# Altium PCB PCB_UVC_Controller_2021-11-05.pcbdoc
Units mil, origin at the board's own origin, x right, y up, seen from the top; angles counter-clockwise.
Board outline 6714.65 x 3384.85 mil, 2 copper layers (Top Layer, Bottom Layer); 67 components, 50 nets, 214 pads, 225 vias.
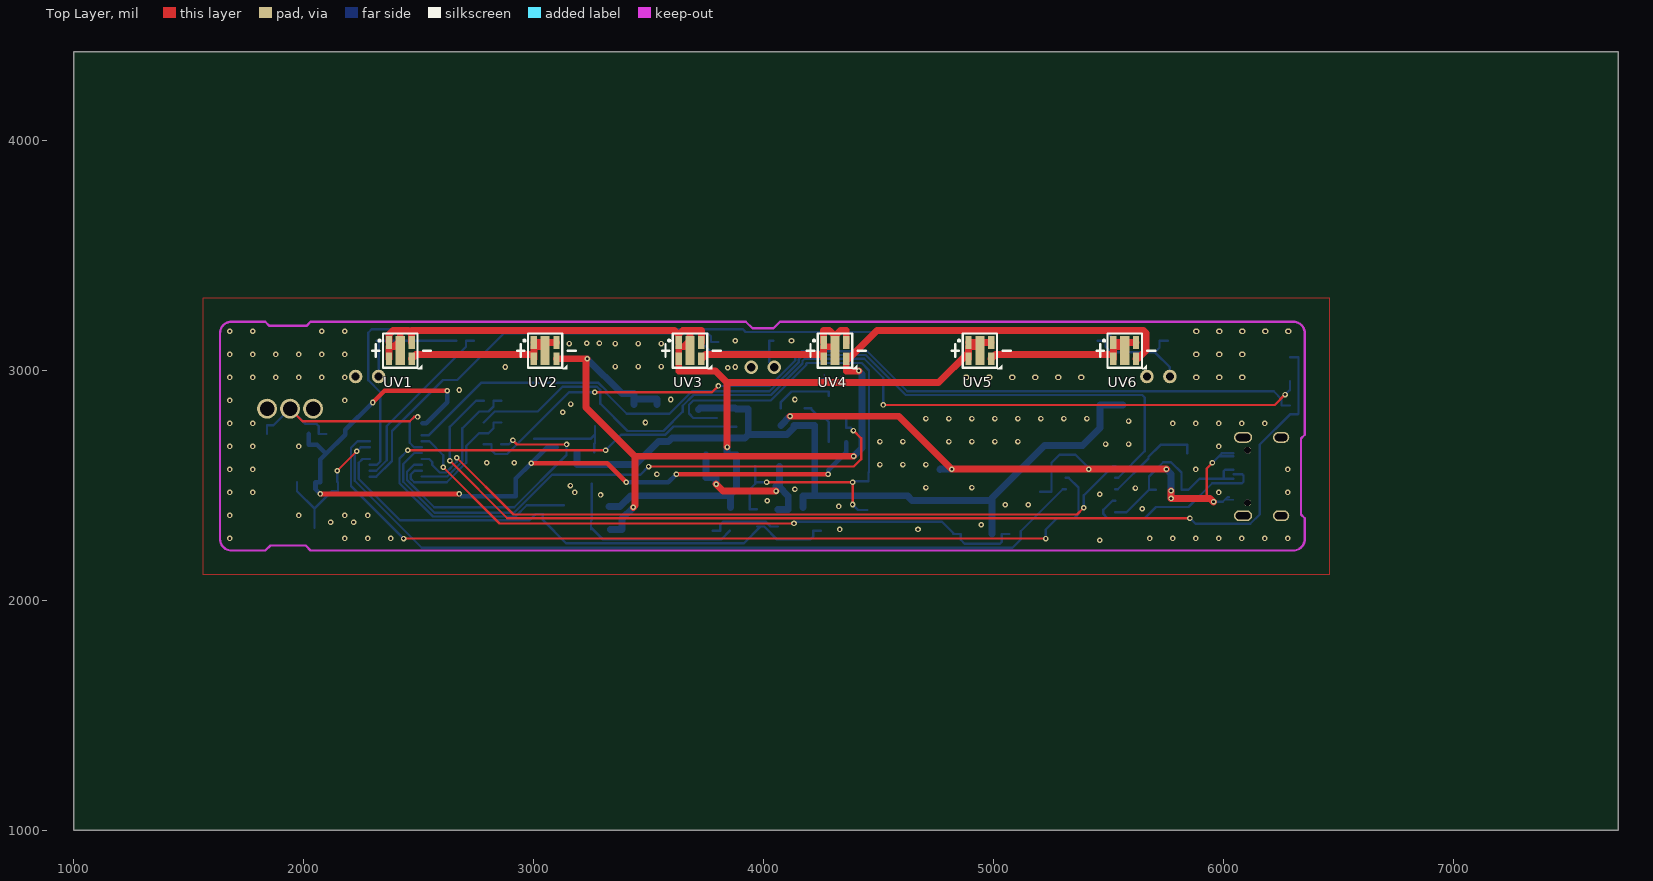
[diagram p0: Top Layer view]
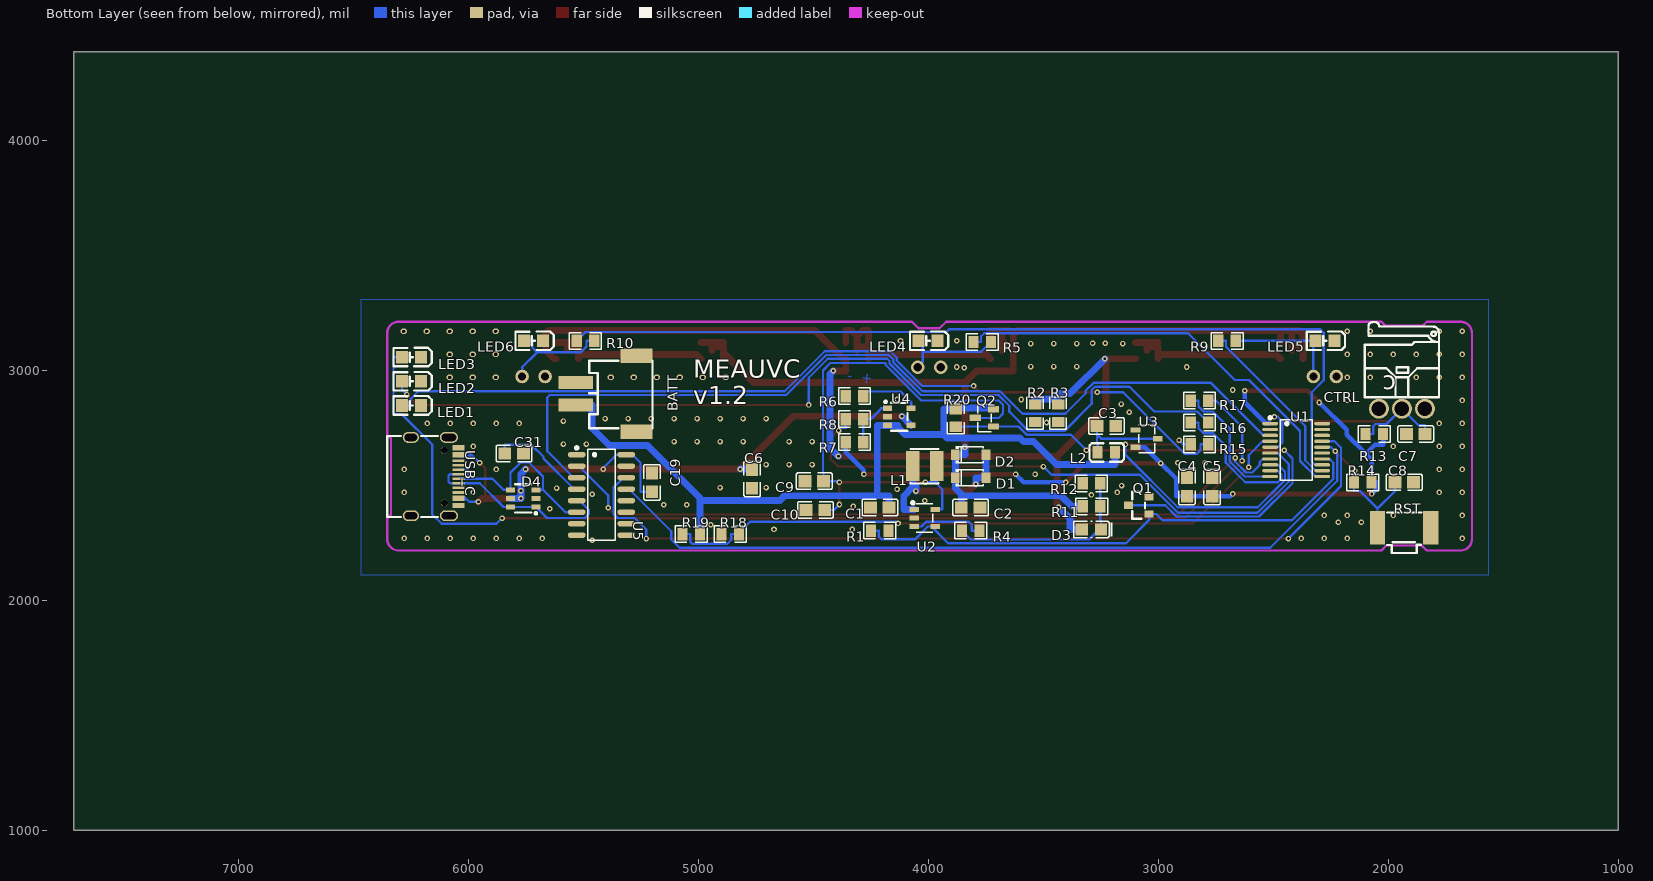
[diagram p1: Bottom Layer view, seen from below]

## Layer stack, top to bottom
Top Layer: signal copper (thickness not stored)
Dielectric: dielectric 12.6, FR-4, Dk 4.8
Bottom Layer: signal copper (thickness not stored)

## Board outline
7714.65,1000 1000,1000 1000,4384.85 7714.65,4384.85

## Components (designator, comment, footprint, x,y, rotation, side; value= is the part's Value field where it differs from the comment)
BATT "XH-2PWB" CONN-SMD_2P-P2.50_XH-2PWB 5400.4,2898.05 r90 bottom
C1 "22uF" C0805 4210.4,2403.05 r0 bottom
C2 "22uF" C0805 3815.4,2403.05 r180 bottom
C3 "22uF" C0805 3225.4,2758.05 r180 bottom
C4 "22uF" C0805 2875.4,2493.05 r90 bottom
C5 "1nF" C0805 2765.4,2493.05 r90 bottom
C6 "22uF" C0805 4765.4,2528.05 r270 bottom
C7 "1nF" C0805 1880.4,2723.05 r0 bottom
C8 "1nF" C0805 1930.4,2513.05 r180 bottom
C9 "22uF" C0805 4495.4,2518.05 r0 bottom
C10 "22uF" C0805 4490.4,2393.05 r0 bottom
C19 "100nF" C0805 5200.4,2513.05 r270 bottom
C31 "100nF" C0805 5800.4,2638.05 r0 bottom
CTRL "MDS6500AL02LS" SW-TH_MDS6500AL02LS 1940.4,2833.05 r0 bottom
D1 "B5819W" SOD-123_L2.8-W1.8-LS3.7-RD 3815.4,2533.05 r0 bottom
D2 "B5819W" SOD-123_L2.8-W1.8-LS3.7-RD 3815.4,2633.05 r0 bottom
D3 "SD0805S020S1R0" D0805-RD 3290.4,2308.05 r180 bottom
D4 "USBLC6-4SC6" SOT-23-6_L2.9-W1.6-P0.95-LS2.8-BR 5760.4,2443.05 r0 bottom
L1 "10uH" IND-SMD_L3.0-W3.0 4015.4,2583.05 r0 bottom
L2 "2.2uH" L0805 3225.4,2643.05 r180 bottom
LED1 "White" LED0805-FD 6246.3,2846.95 r0 bottom
LED2 "White" LED0805-FD 6246.3,2951.95 r0 bottom
LED3 "White" LED0805-FD 6246.3,3056.95 r0 bottom
LED4 "White" LED0805-FD 4000.4,3128.05 r0 bottom
LED5 "White" LED0805-FD 2275.16,3128.05 r0 bottom
LED6 "White" LED0805-FD 5715.64,3128.05 r0 bottom
Q1 "2N7002,215" SOT-23_L2.9-W1.3-P1.90-LS2.4-BR 3084.74,2413.04 r0 bottom
Q2 "AO3415_C181094" SOT-23-3_L2.9-W1.3-P1.90-LS2.4-BR 3755.4,2793.05 r0 bottom
R1 "100K" R0805 4210.4,2303.05 r180 bottom
R2 "33" R0805 3535.4,2813.05 r270 bottom
R3 "33" R0805 3435.4,2813.05 r270 bottom
R4 "10K" R0805 3815.4,2303.05 r0 bottom
R5 "330" R0805 3765.4,3123.05 r0 bottom
R6 "2.2K" R0805 4320.4,2888.05 r0 bottom
R7 "680K" R0805 4320.4,2688.05 r180 bottom
R8 "100K" R0805 4320.4,2788.05 r180 bottom
R9 "330" R0805 2700.4,3128.05 r0 bottom
R10 "330" R0805 5490.4,3128.05 r0 bottom
R11 "120K" R0805 3289.74,2408.04 r180 bottom
R12 "10K" R0805 3290.4,2508.05 r0 bottom
R13 "51K" R0805 2060.4,2723.05 r0 bottom
R14 "51K" R0805 2110.4,2513.05 r0 bottom
R15 "330" R0805 2820.4,2678.05 r0 bottom
R16 "330" R0805 2820.4,2773.05 r0 bottom
R17 "330" R0805 2820.4,2868.05 r0 bottom
R18 "1M" R0805 5030.4,2288.05 r0 bottom
R19 "1M" R0805 4860.4,2288.05 r0 bottom
R20 "10K" R0805 3880.4,2793.05 r270 bottom
RST "KSS241GLFS" KEY-SMD_KSS-2G 1930.44,2314.91 r180 bottom
U1 "MSP430G2553IPW20" TSSOP-20_L6.5-W4.4-P0.65-LS6.4-BL 2400.4,2653.05 r90 bottom
U2 "WD3133E-5/TR" TSOT-23-5_L2.9-W1.6-P0.95-LS2.8-BL 4015.4,2358.05 r90 bottom
U3 "XC6206P332MR" SOT-23-3_L2.9-W1.6-P1.90-LS2.8-BR 3050.41,2703.05 r180 bottom
U4 "TP4054" SOT-23-5_L3.0-W1.7-P0.95-LS2.8-BR 4125.4,2798.05 r180 bottom
U5 "CH340B" SOIC-16_L9.9-W3.9-P1.27-LS6.0-BL 5420.4,2458.05 r90 bottom
USB_C "TYPE-C-31-M-12" USB-C_SMD-TYPE-C-31-M-12 6145.39,2538.08 r90 bottom
UV1 "F.35.00041" LED-SMD_5P-L3.5-W3.5_UVC-UVA 2419.5,3085.45 r0 top
UV2 "F.35.00041" LED-SMD_5P-L3.5-W3.5_UVC-UVA 3049.4,3085.45 r0 top
UV3 "F.35.00041" LED-SMD_5P-L3.5-W3.5_UVC-UVA 3679.3,3085.45 r0 top
UV4 "F.35.00041" LED-SMD_5P-L3.5-W3.5_UVC-UVA 4309.2,3085.45 r0 top
UV5 "F.35.00041" LED-SMD_5P-L3.5-W3.5_UVC-UVA 4939.1,3085.45 r0 top
UV6 "F.35.00041" LED-SMD_5P-L3.5-W3.5_UVC-UVA 5569.1,3085.45 r0 top
? "" ? 3992.9,1885.02 r0 top
? "" ? 6627.39,2378.05 r0 top
? "" ? 6756.52,2716.25 r0 top
? "" ? 6035.5,3354.75 r0 top
? "" ? 1847.9,3334.45 r0 top
? "" ? 1955.3,3497.95 r0 top

## Footprints (in the part's own frame and the unit in brackets; to place one, negate y for a bottom-side part, rotate by r counter-clockwise, add the part's x,y. Pads: shape width x height; smd on the part's side, far side on the other; paste and mask are expansions set on the pad)
C0805 [mm]
  rect 1.41x1.35 smd: 1(1.03,0) 2(-1.03,0)
  silkscreen extent -1.96,-0.9 1.96,0.9
CONN-SMD_2P-P2.50_XH-2PWB [mm]
  rect 1.4x3.8 smd: 1(1.25,3.35) 2(-1.25,3.35)
  rect 1.6x3.5 smd: 3(4.2,-3.35) 4(-4.2,-3.35)
  silkscreen extent -3.82,-5.14 3.65,1.87
D0805-RD [mm]
  rect 1.335x1.35 smd: 1(1.068,0) 2(-1.067,0)
  silkscreen extent -1.96,-0.94 2.29,0.94
IND-SMD_L3.0-W3.0 [mm]
  rect 1.5x3.32 smd: 1(-1.328,0) 2(1.328,0)
  silkscreen extent -1.52,-1.91 1.52,1.91
KEY-SMD_KSS-2G [mm]
  rect 1.7x3.7 smd: 1(2.95,0) 2(-2.95,0)
  silkscreen extent -1.87,-2.78 1.87,1.7
L0805 [mil]
  rect 44.59x54.21 smd: 1(38.05,0) 2(-38.04,0)
  silkscreen extent -73,-40 77,40
LED0805-FD [mil]
  rect 51.2x55.1 smd: 1(41.35,0) 2(-41.35,0)
  silkscreen extent -88,-41 78,40
LED-SMD_5P-L3.5-W3.5_UVC-UVA [mm]
  rect 0.7x1.4 smd: 1(-1.25,0.9) 2(1.25,0.9) 3(-1.25,-0.9) 4(1.25,-0.9)
  rect 1x3.2 smd: 5(0,0)
  silkscreen extent -3.1,-2.05 3.4,1.9
R0805 [mil]
  rect 44.59x54.21 smd: 1(38.04,0) 2(-38.04,0)
  silkscreen extent -69,-36 69,36
SOD-123_L2.8-W1.8-LS3.7-RD [mm]
  rect 0.95x1.15 smd: 1(1.693,0) 2(-1.693,0)
  silkscreen extent -1.41,-0.94 1.63,0.94
SOIC-16_L9.9-W3.9-P1.27-LS6.0-BL [mil]
  oval 23.7x77.6 smd: 1(175,107.7) 2(125,107.7) 3(75,107.7) 4(25,107.7) 5(-25,107.7) 6(-75,107.7) 7(-125,107.7) 8(-175,107.7) 9(-175,-107.7) 10(-125,-107.7) 11(-75,-107.7) 12(-25,-107.7) 13(25,-107.7) 14(75,-107.7) 15(125,-107.7) 16(175,-107.7)
  silkscreen extent -198,-60 211,114
SOT-23-3_L2.9-W1.3-P1.90-LS2.4-BR [mm]
  rect 1.25x0.7 smd: 1(-1,0.95) 2(-1,-0.95) 3(1,0)
  silkscreen extent -0.73,-1.53 0.73,1.53
SOT-23-3_L2.9-W1.6-P1.90-LS2.8-BR [mm]
  rect 1.07x0.6 smd: 1(-1.235,0.95) 2(-1.235,-0.95) 3(1.235,0)
  silkscreen extent -0.88,-1.54 0.88,1.54
SOT-23-5_L3.0-W1.7-P0.95-LS2.8-BR [mm]
  rect 1x0.6 smd: 1(-1.3,0.95) 2(-1.3,0) 3(-1.3,-0.95) 4(1.3,-0.95) 5(1.3,0.95)
  silkscreen extent -1.65,-1.55 0.9,1.78
SOT-23-6_L2.9-W1.6-P0.95-LS2.8-BR [mm]
  rect 1x0.55 smd: 1(-1.4,0.95) 2(-1.4,0) 3(-1.4,-0.95) 4(1.4,-0.95) 5(1.4,0) 6(1.4,0.95)
  silkscreen extent -1.52,-1.55 0.9,1.78
SOT-23_L2.9-W1.3-P1.90-LS2.4-BR [mm]
  rect 1x0.8 smd: 1(-1.15,0.95) 2(-1.15,-0.95) 3(1.15,0)
  silkscreen extent -0.7,-1.5 0.7,1.5
SW-TH_MDS6500AL02LS [mm]
  round 2.2 hole 1.6: 1(-2.54,0) 2(2.54,0) 3(0,0)
  silkscreen extent -4.1,-9.57 4.1,-1.27
TSOT-23-5_L2.9-W1.6-P0.95-LS2.8-BL [mm]
  rect 0.532x1.045 smd: 1(0.95,1.147) 2(0,1.147) 3(-0.95,1.147) 4(-0.95,-1.147) 5(0.95,-1.147)
  silkscreen extent -1.55,-0.9 1.82,1.45
TSSOP-20_L6.5-W4.4-P0.65-LS6.4-BL [mm]
  oval 0.364x1.742 smd: 1(2.925,2.871) 2(2.275,2.871) 3(1.625,2.871) 4(0.975,2.871) 5(0.325,2.871) 6(-0.325,2.871) 7(-0.975,2.871) 8(-1.625,2.871) 9(-2.275,2.871) 10(-2.925,2.871) 11(-2.925,-2.871) 12(-2.275,-2.871) 13(-1.625,-2.871) 14(-0.975,-2.871) 15(-0.325,-2.871) 16(0.325,-2.871) 17(0.975,-2.871) 18(1.625,-2.871) 19(2.275,-2.871) 20(2.925,-2.871)
  silkscreen extent -3.33,-1.77 3.71,3.02
USB-C_SMD-TYPE-C-31-M-12 [mm]
  oval 1.2x2 hole 0.8 slot 1.6 at 90 deg: 0(-4.325,-1.566) 0(4.325,-1.566)
  oval 1.2x1.8 hole 0.8 slot 1.4 at 90 deg: 0(-4.325,2.634) 0(4.325,2.634)
  rect 0.3x1.3 smd: A1(3.35,-2.634) A4(2.55,-2.634) A5(1.25,-2.634) A6(0.25,-2.634) A7(-0.25,-2.634) A8(-1.25,-2.634) A9(-2.55,-2.634) A12(-3.35,-2.634) B1(-3.05,-2.634) B4(-2.25,-2.634) B5(-1.75,-2.634) B6(-0.75,-2.634) B7(0.75,-2.634) B8(1.75,-2.634) B9(2.25,-2.634) B12(3.05,-2.634)
  round 0.75 hole 0.75 unplated: ""(-2.9,-1.066) ""(2.9,-1.066)
  silkscreen extent -4.47,-0.35 4.47,5.23
? [mil]

## Free pads (board coordinates)
  round 59.05 hole 35.43: 1(2325.4,2973.05) 1(4045.4,3013.05) 1(5765.4,2973.05) 2(2225.4,2973.05) 2(3945.4,3013.05) 2(5665.4,2973.05)

## Via types
v1: diameter 24.02, hole 12.01, Top Layer to Bottom Layer, 199 vias
v2: diameter 24.02, hole 11.81, Top Layer to Bottom Layer, 18 vias
v3: diameter 24, hole 12, Top Layer to Bottom Layer, 8 vias

## Nets (pads, with @x,y where several pads share a name; then routed paths per layer and width w, separated by ;. In a path a pad name is that pad's centre, name@x,y a point inside that pad or via, vN(x,y) a via of type N, cw(c..) or ccw(c..) an arc to the next point about the centre after c; other vN are vias at no path point)
3V3: C4.2 C5.2 R7.2 R13.2 R14.2 U1.1 U3.2 | length 3878.8
  Top Layer w20: v2@2071.46,2462.35 v2@2676.24,2462.35 ; v2(2299.43,2859.99) 2351.04,2911.6 v2(2623.9,2911.6) ; v2(2988.48,2596.17) 3319.03,2596.17 v2(3402.28,2512.92) ; v2(3620.29,2547.93) v2(4279.37,2547.93)
  Bottom Layer w20: R13.2@2022.36,2723.05 2022.36,2675.93 2057.6,2675.93 2096.76,2636.77 ; v2@2071.46,2462.35 2050.91,2482.9 2050.91,2513.05 2071.76,2513.05 2072.36,2513.05 2072.36,2612.37 2096.76,2636.77 ; v2(2299.43,2859.99) 2180.17,2740.73 2180.17,2720.18 2096.76,2636.77 ; U1.1@2516.3,2769.85 2532.2,2769.85 2623.9,2861.55 v2(2623.9,2911.6) ; v2@2676.24,2462.35 2686.09,2452.5 2718.82,2452.5 C5.2 C4.2 2921.99,2452.5 2921.99,2529.68 v2(2988.48,2596.17) 3057.96,2665.65 U3.2@3099.03,2665.65 ; v2(3402.28,2512.92) 3585.28,2512.92 v2(3620.29,2547.93) ; v2(4279.37,2547.93) 4279.37,2564.61 4358.44,2643.68 R7.2@4358.44,2688.05
  other v2: 2071.46,2462.35 2676.24,2462.35
BAT: BATT.2 C1.2 L2.1 Q2.2 R18.2 R20.2 U4.3 | length 3633.6
  Bottom Layer w30: L2.1@3187.36,2643.05 3187.36,2590.94 3442.2,2590.94 3541.64,2690.38 3584.66,2690.38 3600.74,2706.46 3918.05,2706.46 3932.52,2720.93 ; Q2.2@3716.03,2830.45 3721.66,2836.08 3875.41,2836.08 R20.2 3932.52,2831.09 3932.52,2720.93 ; C1.2@4169.85,2403.05 4169.85,2454.64 4221.28,2454.64 ; R18.2@4992.36,2288.05 4992.36,2434.72 ; BATT.2@5562.28,2848.84 5462.47,2848.84 5462.47,2749.03 5386.49,2673.05 5221.03,2673.05 4992.36,2444.38 4992.36,2434.72 ; 3932.52,2720.93 3932.81,2720.64 4101.1,2720.64 4131.89,2751.43 4131.89,2760.65 4176.59,2760.65 4221.28,2760.65 4221.28,2454.64 ; 4221.28,2454.64 4625.08,2454.64 4645,2434.72 4992.36,2434.72
BAT_SENSE: R18.1 R19.2 U1.4 | length 2833.6
  Top Layer w10: v1(2606.59,2578.88) 2851.44,2334.03 v1(4131.23,2334.03)
  Bottom Layer w10: U1.4 2546.04,2691.44 2606.59,2630.89 v1(2606.59,2578.88) ; v1(4131.23,2334.03) 4138.65,2341.45 4774.74,2341.45 R19.2@4828.14,2288.05 ; R19.2@4822.36,2288.05 R19.2@4828.14,2288.05 ; R18.1@5068.44,2288.05 5035.08,2288.05 5035.08,2254.69 5026.29,2245.9 4872.85,2245.9 4855.72,2263.03 4855.72,2288.05 4839.04,2288.05 4833.91,2288.05 R19.2@4828.14,2288.05
CHARGE_: R8.2 U1.6 | length 2533.3
  Top Layer w10: v1(3498.93,2581.51) 4390.79,2581.51 4422.98,2613.7 4422.98,2704.57 v1@4389.5,2738.05
  Bottom Layer w10: U1.6 2480.25,2640.25 2432.32,2592.32 2432.32,2515.95 2568.02,2380.25 2913.38,2380.25 3079.36,2546.23 3463.65,2546.23 v1(3498.93,2581.51) ; R8.2@4358.44,2788.05 4358.44,2749.87 4377.68,2749.87 v1@4389.5,2738.05
  other v1: 4389.5,2738.05
CTRL: C7.2 CTRL.3 R13.1 U1.5 | length 1172.7
  Top Layer w10: CTRL.3 1994.8,2778.65 2461,2778.65 2479.8,2797.45 v1@2494.9,2797.45
  Bottom Layer w10: C7.2@1839.85,2723.05 1839.85,2760.7 1868.05,2760.7 1940.4,2833.05 2007.22,2766.23 2055.26,2766.23 2065.08,2756.41 2065.08,2723.05 2081.76,2723.05 R13.1@2098.44,2723.05 ; v1@2494.9,2797.45 2479.8,2797.45 2460.4,2778.05 2460.4,2684.85 2479.4,2665.85 U1.5
  other v1: 2494.86,2797.49
D3_1: D3.1 R4.1 R11.1 R12.2 | length 844.5
  Bottom Layer w10: D3.1 D3.1@3248.37,2316.43 ; R12.2 3252.36,2446.88 3251.7,2446.22 3251.7,2427.13 R11.1 3251.7,2349.01 3248.37,2345.68 D3.1@3248.37,2316.43 ; R4.1@3853.44,2303.05 3814.49,2264.1 3300.7,2264.1 D3.1@3248.37,2316.43
DTR: C8.2 R14.1 RST.2 U1.16 U5.13 | length 4106.7
  Top Layer w10: v3(2145.4,2563.05) v3(2230.4,2648.05)
  Bottom Layer w10: C8.2@1970.95,2513.05 1970.95,2474.44 2046.58,2398.81 ; RST.2 2046.58,2398.81 ; v3(2145.4,2563.05) 2145.4,2516.09 R14.1 2148.44,2474.87 2122.64,2474.87 2046.58,2398.81 ; U1.16 2248.2,2665.84 v3(2230.4,2648.05) 2221.31,2638.95 2221.31,2520.04 2512.8,2228.55 5080.79,2228.55 5117.16,2264.92 5117.16,2300.06 5300.15,2483.05 U5.13@5312.69,2483.05
GND: BATT.1 BATT.3 BATT.4 C1.1 C2.1 C3.1 C4.1 C5.1 C6.1 C7.1 C8.1 C9.1 C10.1 C19.2 C31.2 CTRL.1 D4.2 LED1.2 LED2.2 LED3.2 LED4.2 LED5.2 LED6.2 pad.2 Q1.2 R1.1 R2.1 R3.1 R6.1 R12.1 R19.1 RST.1 U1.20 U2.2 U3.1 U4.2 U5.1 USB_C.0 USB_C.A1 USB_C.A12 USB_C.B1 USB_C.B12
  other v1: 5460.56,2261.44 1678.2,2269.27 1678.2,2269.27 2178.2,2269.27 2278.2,2269.27 2378.2,2269.27 5678.2,2269.27 5778.2,2269.27 5878.2,2269.27 5978.2,2269.27 6078.2,2269.27 6178.2,2269.27 6278.2,2269.27 4330.4,2308.05 4670.4,2308.05 4945.4,2328.05 2116.46,2338.89 2216.45,2338.89 1678.2,2369.27 1678.2,2369.27 1978.2,2369.27 1978.2,2369.27 2178.2,2369.27 2278.2,2369.27 5645.4,2398.05 4325.4,2408.05 5049.57,2415.85 5149.57,2415.85 4015.4,2433.05 3290.4,2458.05 5460.56,2461.44 1678.2,2469.27 1678.2,2469.27 1778.2,2469.27 1778.2,2469.27 3178.2,2469.27 5978.2,2469.27 6278.2,2469.27 4135.4,2483.05 5615.4,2488.05 4704.79,2490.32 4904.79,2490.32 3159.13,2499.03 1678.2,2569.27 1678.2,2569.27 1778.2,2569.27 1778.2,2569.27 5878.2,2569.27 6278.2,2569.27 4504.79,2590.32 4604.79,2590.32 4704.79,2590.32 2795.4,2598.05 2915.4,2598.05 1678.2,2669.27 1678.2,2669.27 1778.2,2669.27 1778.2,2669.27 1978.2,2669.27 1978.2,2669.27 5978.2,2669.27 5485.81,2679.08 5585.81,2679.08 4504.79,2690.32 4604.79,2690.32 4804.79,2690.32 4904.79,2690.32 5004.79,2690.32 5104.79,2690.32 1678.2,2769.27 1678.2,2769.27 1778.2,2769.27 1778.2,2769.27 5778.2,2769.27 5878.2,2769.27 5978.2,2769.27 6078.2,2769.27 6178.2,2769.27 3485.4,2773.05 5585.81,2779.08 4704.79,2790.32 4804.79,2790.32 4904.79,2790.32 5004.79,2790.32 5104.79,2790.32 5204.79,2790.32 5304.79,2790.32 5404.79,2790.32 3125.4,2818.05 3160.4,2853.05 1678.2,2869.27 1678.2,2869.27 2178.2,2869.27 2178.2,2869.27 3595.4,2873.05 4135.4,2873.05 2676.1,2914.32 1678.2,2969.27 1678.2,2969.27 1778.2,2969.27 1778.2,2969.27 1878.2,2969.27 1878.2,2969.27 1978.2,2969.27 1978.2,2969.27 2078.2,2969.27 2078.2,2969.27 2178.2,2969.27 2178.2,2969.27 4878.2,2969.27 4882,2969.26 4978.2,2969.27 4982,2969.26 5078.2,2969.27 5082,2969.26 5178.2,2969.27 5182,2969.26 5278.2,2969.27 5282,2969.26 5378.2,2969.27 5382,2969.26 5878.2,2969.27 5882,2969.26 5978.2,2969.27 5982,2969.26 6078.2,2969.27 6082,2969.26 3842.77,3011.1 2876.1,3014.32 3876.1,3014.32 3354.6,3016.25 3454.6,3016.25 3554.6,3016.25 1678.2,3069.27 1678.2,3069.27 1778.2,3069.27 1778.2,3069.27 1878.2,3069.27 1878.2,3069.27 1978.2,3069.27 1978.2,3069.27 2078.2,3069.27 2078.2,3069.27 2178.2,3069.27 2178.2,3069.27 5878.2,3069.27 5882,3069.26 5978.2,3069.27 5982,3069.26 6078.2,3069.27 6082,3069.26 3154.6,3116.25 3354.6,3116.25 3454.6,3116.25 3554.6,3116.25 3230.4,3118.05 3285.4,3118.05 3875.4,3128.05 4120.4,3128.05 1678.2,3169.27 1678.2,3169.27 1778.2,3169.27 1778.2,3169.27 2078.2,3169.27 2078.2,3169.27 2178.2,3169.27 2178.2,3169.27 5878.2,3169.27 5882,3169.26 5978.2,3169.27 5982,3169.26 6078.2,3169.27 6082,3169.26 6178.2,3169.27 6182,3169.26 6278.2,3169.27 6282,3169.26
  other v3: 3535.4,2548.05
LED1_1: LED1.1 R15.2 | length 3842.6
  Top Layer w10: v1(3264.8,2904.2) 3774.8,2904.2 v1(3802.67,2932.07)
  Bottom Layer w10: R15.2@2782.36,2678.05 2815.72,2678.05 2815.72,2653.03 2832.43,2636.32 2884.84,2636.32 3152.72,2904.2 v1(3264.8,2904.2) ; v1(3802.67,2932.07) 4025.39,2932.07 4136.43,3043.11 4136.43,3054.48 4164.69,3082.74 4449.66,3082.74 4623.76,2908.64 6216.79,2908.64 6250.98,2874.45 6250.98,2846.95 LED1.1@6287.65,2846.95
LED2_1: LED2.1 R16.2 | length 4053.5
  Top Layer w10: v1(4519.49,2849.28) 6221.08,2849.28 v1(6266.3,2894.5)
  Bottom Layer w10: R16.2@2782.36,2773.05 2830.56,2821.25 3017.41,2821.25 3124.74,2928.58 3275.12,2928.58 3288.8,2914.9 3288.8,2855.09 3407.39,2736.5 3563.46,2736.5 3647.28,2820.32 3647.28,2845.44 3694.73,2892.89 4031.73,2892.89 4168.61,3029.77 4168.61,3041.14 4178.03,3050.56 4436.32,3050.56 4519.49,2967.39 v1(4519.49,2849.28) ; v1(6266.3,2894.5) 6285.13,2913.33 6287.65,2913.33 LED2.1@6287.65,2951.95
LED3_1: LED3.1 R17.2 | length 4802.8
  Top Layer w10: v1(2635.22,2606.87) 2884.97,2357.12 v1(5852.65,2357.12)
  Bottom Layer w10: v1(2635.22,2606.87) 2635.22,2754.28 2748.99,2868.05 R17.2@2782.36,2868.05 ; v1(5852.65,2357.12) 5877.16,2332.61 6115.28,2332.61 6156.14,2373.47 6156.14,2676.96 6287.5,2808.32 6321.4,2808.32 6324.32,2811.24 6324.32,3056.95 LED3.1@6287.65,3056.95
P2.0: R15.1 U1.8 | length 1295.5
  Top Layer w10: v1(2909.06,2695.39) 2926.64,2677.81 v1(3142.59,2677.81)
  Bottom Layer w10: U1.8 2478.86,2589.07 2448.41,2558.62 2448.41,2522.62 2566.8,2404.23 2914.6,2404.23 3142.59,2632.22 v1(3142.59,2677.81) ; R15.1@2858.44,2678.05 2891.81,2678.05 2891.81,2678.14 v1(2909.06,2695.39)
P2.1: R16.1 U1.9 | length 637.8
  Bottom Layer w10: U1.9 2481.59,2563.48 2464.5,2546.39 2464.5,2529.29 2480.02,2513.77 2621.9,2513.77 2705.75,2597.62 2705.75,2669.75 2762.23,2726.23 2803.28,2726.23 2825.08,2748.03 2825.08,2773.05 R16.1@2858.44,2773.05
P2.2: R17.1 U1.10 | length 580.5
  Bottom Layer w10: U1.10 2623.26,2537.89 2689.37,2604 2689.37,2747.52 2763.08,2821.23 2803.28,2821.23 2825.08,2843.03 2825.08,2868.05 R17.1@2858.44,2868.05
P2.3: R5.1 U1.11 | length 1881.3
  Bottom Layer w10: U1.11@2287.4,2537.85 2315.5,2537.85 2383.3,2605.65 2383.3,2735.95 2605.1,2957.75 2667,2957.75 2870.8,3161.55 3756.6,3161.55 3770.1,3148.05 3770.1,3123.05 R5.1@3803.44,3123.05
P2.4: R9.1 U1.12 | length 787.2
  Bottom Layer w10: U1.12 2315.04,2563.48 2360.39,2608.83 2360.39,2757.53 2705.08,3102.22 2705.08,3128.05 R9.1@2738.44,3128.05
P2.5: R10.1 U1.13 | length 3909.3
  Bottom Layer w10: U1.13 2317.86,2589.07 2332.74,2603.95 2332.74,2904.44 2279.84,2957.34 2279.84,3163.75 2295.12,3179.03 3908.18,3179.03 3920.53,3166.68 5489.81,3166.68 R10.1@5528.44,3128.05
Q1_3: Q1.3 Q2.1 R20.1 | length 2423.4
  Top Layer w10: v1@2452.32,2652.55 v1@3312.02,2652.55
  Bottom Layer w10: v1@2452.32,2652.55 2416.23,2616.46 2416.23,2509.28 2561.35,2364.16 2920.05,2364.16 2968.93,2413.04 Q1.3 ; v1@3312.02,2652.55 3379.88,2720.41 3572.22,2720.41 3607.46,2755.65 3680.35,2755.65 3716.03,2755.65 3841.58,2755.65 3842.22,2755.01 R20.1
  other v1: 2452.32,2652.55 3312.02,2652.55
R5_2: LED4.1 pad.1@4045.4,3013.05 R5.2 | length 456.1
  Bottom Layer w10: R5.2@3727.36,3123.05 3769.9,3080.51 4023.42,3080.51 ; LED4.1@4041.75,3128.05 4023.42,3128.05 4023.42,3080.51 ; pad.1@4045.4,3013.05 4023.42,3035.03 4023.42,3080.51
R9_2: LED5.1 pad.1@2325.4,2973.05 R9.2 | length 500.8
  Bottom Layer w10: LED5.1@2316.52,3128.05 LED5.1@2325.4,3128.05 ; pad.1@2325.4,2973.05 LED5.1@2325.4,3128.05 ; R9.2@2662.36,3128.05 LED5.1@2325.4,3128.05
R10_2: LED6.1 pad.1@5765.4,2973.05 R10.2 | length 510
  Bottom Layer w10: R10.2@5452.36,3128.05 5485.72,3128.05 5485.72,3103.03 5509.94,3078.81 5700.74,3078.81 ; LED6.1@5756.99,3128.05 5720.32,3128.05 5720.32,3098.39 5700.74,3078.81 ; pad.1@5765.4,2973.05 5765.4,3013.05 5700.74,3077.71 5700.74,3078.81
RTS: U1.17 U5.14 | length 3772.7
  Top Layer w10: v1(2433.68,2268.36) v1@5225.95,2268.36
  Bottom Layer w10: U1.17 2233.8,2691.45 2205.2,2662.85 2205.2,2496.85 v1@2433.7,2268.35 ; v1@5225.95,2268.36 5225.95,2307.97 5276.03,2358.05 5350.64,2358.05 5367.76,2375.17 5367.76,2490.45 5325.16,2533.05 U5.14@5312.7,2533.05
  other v1: 5225.95,2268.36
RXD: U1.3 U5.3 | length 3898.2
  Bottom Layer w10: U1.3 2542.48,2717.03 2770.76,2945.31 3281.14,2945.31 3314.57,2911.88 3314.57,2900.5 3404,2811.07 3590.16,2811.07 3688.07,2908.98 4025.06,2908.98 4152.52,3036.44 4152.52,3047.81 4171.36,3066.65 4442.99,3066.65 4617.13,2892.51 5645.59,2892.51 5656.42,2881.68 5656.42,2648.7 5540.77,2533.05 U5.3@5528.1,2533.05
S$1868: 
S$1870: 
S$1874: 
S$1878: 
S$1881: 
S$1891: 
S$1893: 
S$5398: 
S$5400: 
S$6049: 
TXD: U1.7 U5.2 | length 3304
  Top Layer w10: v1(2664.87,2619.8) 2911.46,2373.21 5361.87,2373.21 v1@5391.11,2402.45
  Bottom Layer w10: U1.7 2545.75,2614.66 2558.8,2601.61 2558.8,2588.55 2591.56,2555.79 2618.4,2555.79 2664.87,2602.26 v1(2664.87,2619.8) ; v1@5391.11,2402.45 5391.11,2456.14 5518.02,2583.05 U5.2@5528.1,2583.05
  other v1: 5391.11,2402.45
U2_1: D1.2 D2.2 L1.2 U2.1 | length 736
  Top Layer w30: v2(3792.65,2505.01) 3822.79,2474.87 v2(4053.19,2474.87)
  Bottom Layer w30: D2.2@3748.77,2633.05 3748.77,2533.05 3792.48,2533.05 3792.48,2505.18 v2(3792.65,2505.01) ; v2(4053.19,2474.87) 4053.19,2496.41 4067.68,2510.9 ; U2.1@4060.58,2395.45 4106.16,2395.45 4106.16,2454.21 4067.68,2492.69 4067.68,2510.9 ; L1.2@4067.68,2583.05 4067.68,2511.81 4067.68,2510.9
U2_3: R4.2 U2.3 | length 323
  Bottom Layer w10: R4.2@3777.36,2303.05 3810.72,2303.05 3810.72,2328.07 3824.85,2342.2 4007.39,2342.2 4028.94,2320.65 U2.3@4060.58,2320.65
U2_5: C9.2 C10.2 L1.1 Q2.3 U2.5 | length 2417.1
  Top Layer w10: v1(4012.12,2512.9) v1(4386.14,2512.9) v1(4386.14,2416.62)
  Bottom Layer w10: Q2.3@3794.77,2793.05 3693.04,2793.05 3674.45,2811.64 3674.45,2849.84 3693.04,2868.43 4030.04,2868.43 4184.7,3023.09 4184.7,3028.61 4187.63,3031.54 4425.49,3031.54 4457.58,2999.45 4457.58,2558.43 4454.85,2555.7 4454.85,2518.05 4416.02,2518.05 4391.29,2518.05 v1(4386.14,2512.9) ; L1.1@3963.12,2583.05 3963.12,2513.9 ; U2.5@3970.22,2395.45 3954.4,2395.45 3938.58,2395.45 3938.58,2482.09 3963.12,2506.63 3963.12,2513.9 ; v1(4012.12,2512.9) 4011.12,2513.9 3963.12,2513.9 ; v1(4386.14,2416.62) 4409.71,2393.05 C10.2@4449.85,2393.05
U3_3: C3.2 L2.2 U3.3 | length 387.4
  Bottom Layer w10: U3.3@3001.79,2703.05 3248.6,2703.05 3265.96,2720.41 ; L2.2@3263.45,2643.05 3263.45,2681.23 3265.96,2683.74 3265.96,2720.41 ; C3.2@3265.96,2758.05 3265.96,2720.41
U4_1: R7.1 R8.1 U4.1 | length 234.2
  Bottom Layer w10: U4.1@4176.59,2835.45 4207.34,2835.45 4207.34,2829.7 4248.99,2788.05 4265.68,2788.05 R8.1@4269.34,2788.05 ; R7.1@4282.36,2688.05 4282.36,2775.03 R8.1@4269.34,2788.05 ; R8.1@4282.36,2788.05 R8.1@4269.34,2788.05
U4_5: R6.2 U4.5 | length 273.7
  Bottom Layer w10: U4.5 4074.2,2861.85 4120.4,2908.05 4282.4,2908.05 R6.2
U5_4: C31.1 U5.4 | length 434.6
  Bottom Layer w10: U5.4@5528.1,2483.05 5539.05,2483.05 5672.52,2616.52 5672.52,2623.93 5724.29,2675.7 5840.95,2675.7 C31.1@5840.95,2638.05
USB_N: D4.3 D4.4 U5.6 USB_C.A7 USB_C.B7 | length 855.1
  Bottom Layer w10: U5.6@5528.1,2383.05 5577.13,2383.05 5674.53,2480.45 ; D4.3@5705.28,2480.45 5674.53,2480.45 ; 6005.42,2528.23 USB_C.A7@6042.08,2528.23 ; USB_C.B7@6042.08,2567.6 6005.42,2567.6 5999.95,2562.14 5999.95,2528.23 5894.06,2528.23 5846.28,2480.45 5830.9,2480.45 5815.52,2480.45 5815.52,2555.54 5770.65,2600.41 5736.41,2600.41 5674.53,2538.53 5674.53,2480.45
USB_P: D4.1 D4.6 U5.5 USB_C.A6 USB_C.B6 | length 841
  Bottom Layer w10: U5.5 5515.7,2433.05 5476.3,2393.65 5476.3,2375.35 5493.6,2358.05 5657.7,2358.05 5705.3,2405.65 5712.97,2405.65 5720.66,2405.65 D4.6 5846.28,2405.65 5949.17,2508.54 6042.08,2508.54 6060.41,2508.54 6078.74,2508.54 6085.4,2515.2 6085.4,2543.05 6080.53,2547.91 USB_C.A6@6042.08,2547.91
UV1_3: C2.2 D1.1 D2.1 R11.2 UV1.1 UV1.2 UV1.3 UV1.5 UV3.1 UV3.2 UV3.3 UV3.5 UV5.1 UV5.2 UV5.3 UV5.5 | length 4728.4
  Top Layer w30: UV1.3 2370.29,3102.59 2392.64,3102.59 UV1.5@2419.5,3129.45 ; UV1.1 2370.29,3147.17 2370.29,3155.79 2387.95,3173.45 2419.5,3173.45 ; UV1.5@2419.5,3085.45 UV1.5@2419.5,3129.45 ; UV1.2 2468.71,3160.31 ; UV3.1 3630.09,3147.17 3630.09,3155.79 ; UV3.5@3679.3,3085.45 UV3.5@3679.3,3129.45 ; UV3.2 3728.51,3173.45 3679.3,3173.45 ; v2@3840.61,2666.45 3840.61,2946.49 ; UV5.3 UV5.3@4889.89,3076.31 ; UV5.1 UV5.5@4939.1,3120.88 ; UV5.5@4939.1,3085.45 UV5.5@4939.1,3102.59 ; UV5.2 UV5.5@4939.1,3120.88 ; UV1.5@2419.5,3129.45 2419.5,3173.45 ; 2419.5,3173.45 2455.57,3173.45 2468.71,3160.31 ; 2468.71,3160.31 2468.71,3173.45 3612.43,3173.45 3630.09,3155.79 ; 3630.09,3155.79 3647.75,3173.45 3679.3,3173.45 ; UV3.5@3679.3,3129.45 3679.3,3173.45 ; UV3.5@3679.3,3129.45 3652.44,3102.59 3630.09,3102.59 3630.09,3066.3 UV3.3 3630.09,2997.45 3789.65,2997.45 3840.61,2946.49 ; 3840.61,2946.49 4760.07,2946.49 UV5.3@4889.89,3076.31 ; UV5.3@4889.89,3076.31 4889.89,3102.59 UV5.5@4939.1,3102.59 ; UV5.5@4939.1,3102.59 UV5.5@4939.1,3120.88
  Bottom Layer w30: R11.2 3375.09,2408.04 3421.7,2454.65 3855.95,2454.65 ; v2@3840.61,2666.45 3840.61,2633.05 3882.03,2633.05 3882.03,2533.05 3882.03,2485.4 3855.95,2459.32 3855.95,2454.65 ; C2.2@3855.95,2403.05 3855.95,2454.65
  other v2: 3840.61,2666.45
UV1_4: UV1.4 UV2.1 UV2.2 UV2.3 UV2.5 | length 774.7
  Top Layer w30: UV1.4 2486.99,3068.3 UV2.3@3000.19,3068.3 ; UV2.3 UV2.3@3000.19,3068.3 ; UV2.1 UV2.5@3049.4,3120.88 ; UV2.5@3049.4,3085.45 UV2.5@3049.4,3102.59 ; UV2.2 UV2.5@3049.4,3120.88 ; UV2.3@3000.19,3068.3 3000.19,3069.17 3000.19,3102.59 UV2.5@3049.4,3102.59 ; UV2.5@3049.4,3102.59 UV2.5@3049.4,3120.88
UV2_4: D3.2 R2.2 R3.2 UV2.4 UV4.4 UV6.4 | length 4419.7
  Top Layer w30: UV2.4 v2(3231.87,3050.02) 3227.78,3045.93 3227.78,2838 3439.66,2626.12 ; v2(3432.54,2404.29) 3439.66,2411.41 3439.66,2626.12 ; v2(4390.4,2626.12) 3439.66,2626.12 ; v2@4413.25,2997.45 4358.41,2997.45 UV4.4 4368.84,3050.02 4492.28,3173.46 5650.64,3173.46 5661.53,3162.57 5661.53,3086.31 5625.24,3050.02 UV6.4
  Bottom Layer w30: v2(3231.87,3050.02) 3383.49,2898.4 3435.4,2898.4 3435.4,2874.75 ; D3.2 3383.72,2308.04 3383.72,2355.47 v2(3432.54,2404.29) ; R3.2 3435.4,2874.75 ; R2.2 3535.4,2874.75 3435.4,2874.75 ; v2(4390.4,2626.12) 4426.52,2662.24 4426.52,2984.18 v2@4413.25,2997.45
  other v2: 4413.25,2997.45
UV3_4: UV3.4 UV4.1 UV4.2 UV4.3 UV4.5 | length 931.5
  Top Layer w30: UV3.4 3746.79,3068.3 4252.03,3068.3 UV4.3@4259.99,3060.34 ; UV4.3 UV4.3@4259.99,3060.34 ; UV4.1 4259.99,3173.45 4284.6,3173.45 4309.2,3148.85 ; UV4.5@4309.2,3085.45 UV4.5@4309.2,3102.59 ; UV4.2 4358.41,3173.45 4333.8,3173.45 4309.2,3148.85 ; UV4.3@4259.99,3060.34 4259.99,3102.59 UV4.5@4309.2,3102.59 ; UV4.5@4309.2,3102.59 4309.2,3148.85
UV5_4: UV5.4 UV6.1 UV6.2 UV6.3 UV6.5 | length 774.7
  Top Layer w30: UV5.4 5006.59,3068.3 UV6.3@5519.85,3068.3 ; UV6.3@5519.85,3050.02 UV6.3@5519.85,3068.3 ; UV6.1@5519.85,3120.88 UV6.5@5569.06,3120.88 ; UV6.5@5569.06,3085.45 UV6.5@5569.06,3102.59 ; UV6.2 UV6.5@5569.06,3120.88 ; UV6.3@5519.85,3068.3 5519.85,3069.17 5519.85,3102.59 UV6.5@5569.06,3102.59 ; UV6.5@5569.06,3102.59 UV6.5@5569.06,3120.88
UVC_EN: Q1.1 R1.2 U1.14 U2.4 | length 2388.9
  Bottom Layer w10: U1.14 2255.61,2614.66 2238.94,2597.99 2238.94,2527.88 2418.75,2348.07 2981.14,2348.07 3008.71,2375.64 Q1.1 3039.47,2348.82 3140.28,2248.01 3913.4,2248.01 U2.4@3986.04,2320.65 ; U2.4@3970.22,2320.65 U2.4@3986.04,2320.65 ; R1.2@4248.44,2303.05 4215.08,2303.05 4215.08,2278.03 4201.91,2264.86 4057.65,2264.86 4001.86,2320.65 U2.4@3986.04,2320.65
VBUS: C6.2 C19.1 D4.5 U4.4 U5.16 USB_C.A4 USB_C.A9 USB_C.B4 USB_C.B9 | length 3094.1
  Top Layer w10: 5925.4,2443.05 5925.4,2573.05 v3(5950.4,2598.05)
  Top Layer w30: v2(4113.97,2800.4) 4586.38,2800.4 v2(4816.68,2570.1) v3(5412.82,2570.1) v2@5750.35,2570.1 ; v3(5770.83,2476.56) 5770.83,2443.05 5940.4,2443.05 v3(5955.4,2428.05)
  Bottom Layer w6.38: 5995.4,2428.05 6005.03,2437.68 USB_C.A9@6042.07,2437.68
  Bottom Layer w10: C19.1 5238.05,2472.5 ; 5238,2472.55 5250.4,2472.55 5250.4,2598.05 5285.4,2633.05 U5.16 5355.4,2633.05 5412.8,2575.65 v3(5412.82,2570.1) ; v3(5950.4,2598.05) 5978.61,2626.26 USB_C.B9@6042.07,2626.26 ; v3(5955.4,2428.05) 5995.4,2428.05 6015.6,2448.15 USB_C.B4@6021,2448.15 ; 5974.35,2622 5991.21,2638.86 USB_C.A4@6042.07,2638.86
  Bottom Layer w30: U4.4@4074.22,2760.65 v2(4113.97,2800.4) ; C6.2 4766.9,2570.1 v2(4816.68,2570.1) ; v2@5750.35,2570.1 5770.83,2549.62 v3(5770.83,2476.56) 5770.83,2443.05 D4.5@5815.52,2443.05
  other v2: 5750.35,2570.1
  other v3: 5770.83,2443.05
pads on no net: CTRL.2 U1.2 U1.15 U1.18 U1.19 U5.7 U5.8 U5.9 U5.10 U5.11 U5.12 U5.15 USB_C. USB_C.A5 USB_C.A8 USB_C.B5 USB_C.B8

## Polygon pours and split planes (outlines as drawn)
GND on Bottom Layer (solid): 1565.4,3308.05 1565.4,2108.05 6465.4,2108.05 6465.4,3308.05 1565.4,3308.05
GND on Top Layer (solid): 1560.4,3313.05 1560.4,2113.05 6460.4,2113.05 6460.4,3313.05 1560.4,3313.05

## Keep-outs
Keep-Out Layer:
  lines w10: 1635.98,2266.47 ccw(c1685.98,2266.47) 1685.98,2216.47 ; 1635.99,3161.47 cw(c1685.99,3161.47) 1685.99,3211.47 ; 6301.78,3211.47 cw(c6301.78,3161.47) 6351.78,3161.47
  lines w10 net S$1891: 6301.78,2216.47 ccw(c6301.78,2266.47) 6351.78,2266.47

## Other copper
Bottom Layer:
  text "-  +" at 4353.53,2955.76 h45 r8

## Silkscreen, mask and mechanical layers (free items; w line width, h text height)
Bottom Overlay:
  text "MEAUVC" at 5020.4,2968.05 h80
  text "v1.2" at 5020.4,2853.05 h80

## Text inside footprints (layer, text, board x,y; h text height)
CTRL: Bottom Overlay "c" at 1964.01,2976.92 h80 r180